# EAGLE board LabPower test2 (EAGLE 7.5.0)
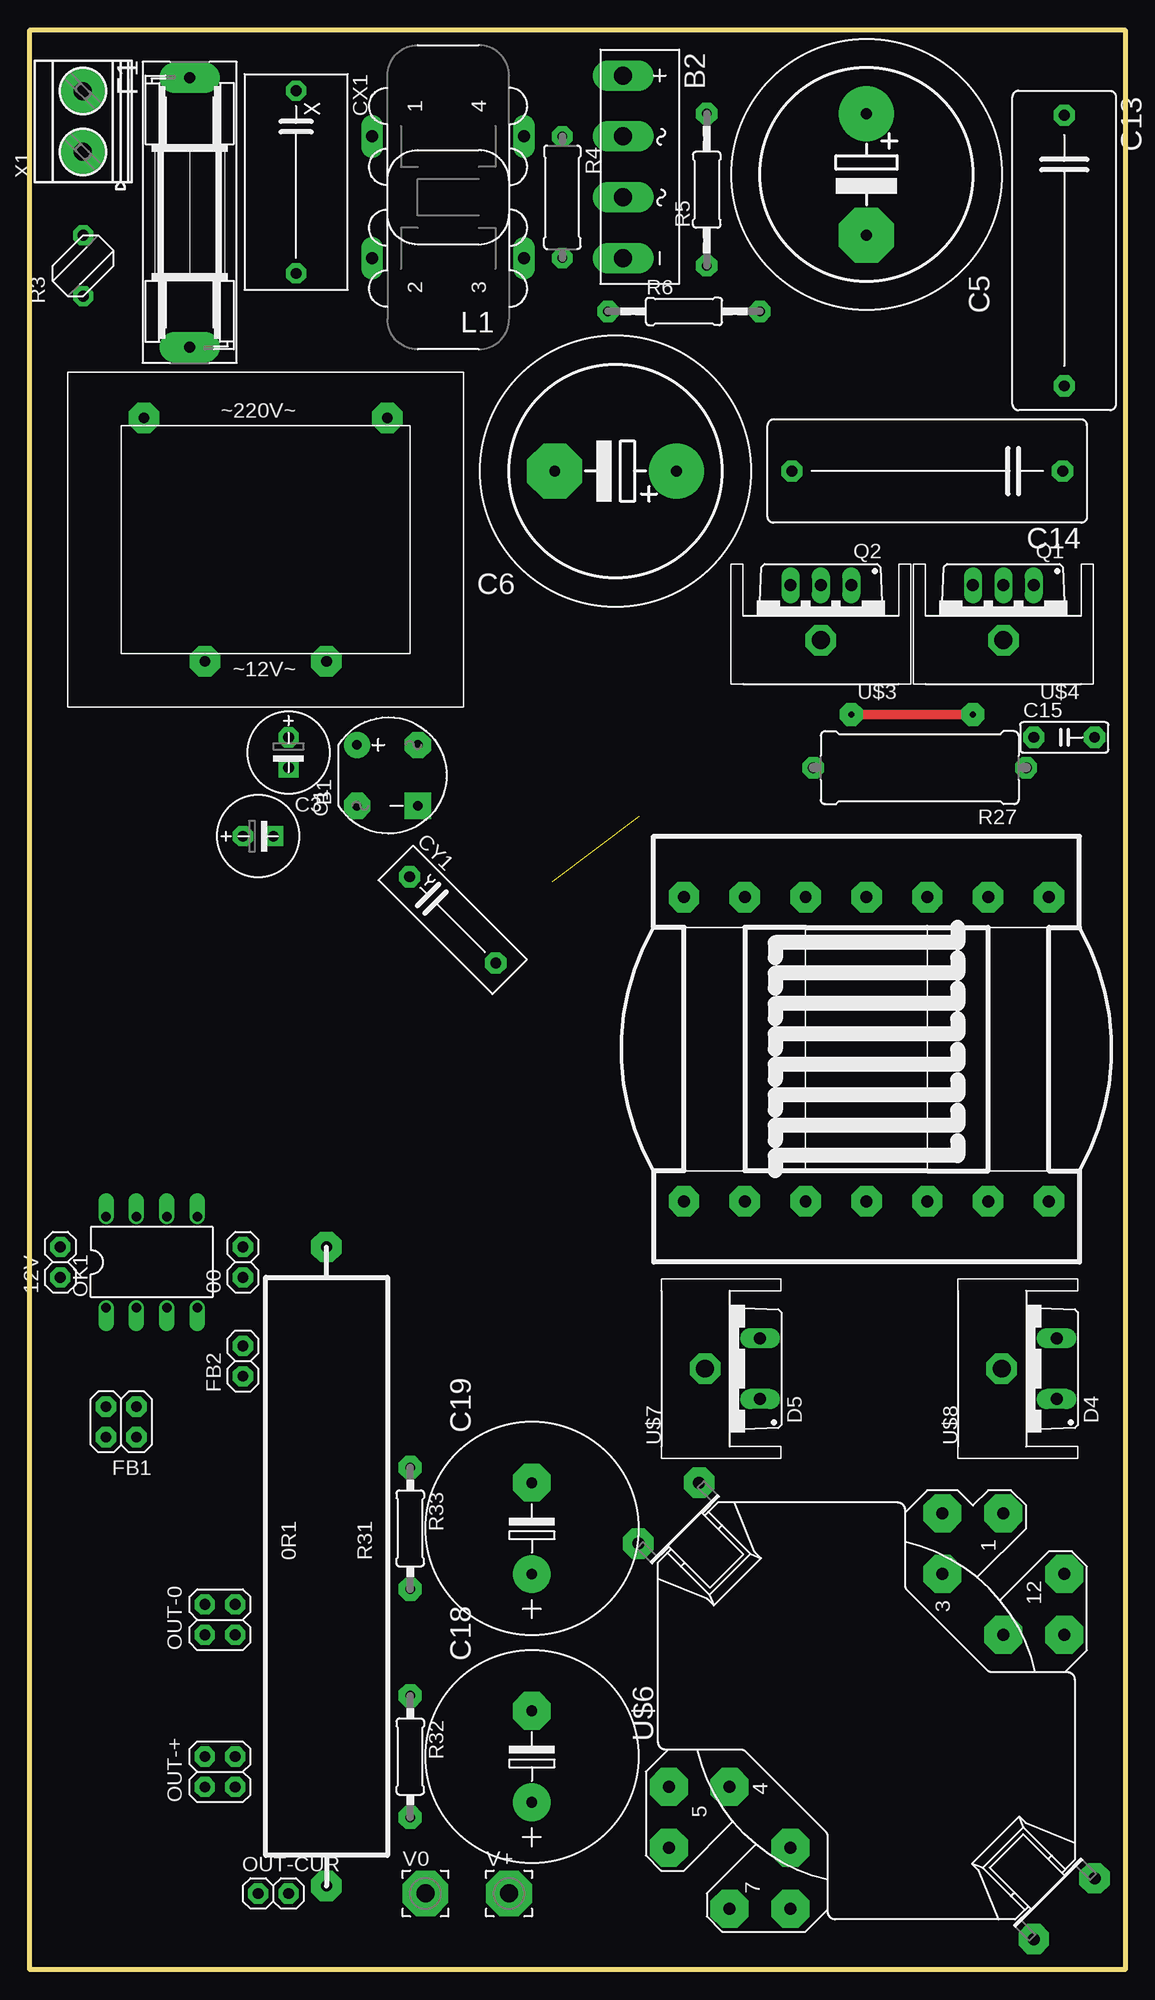
[diagram p0: board, top side]
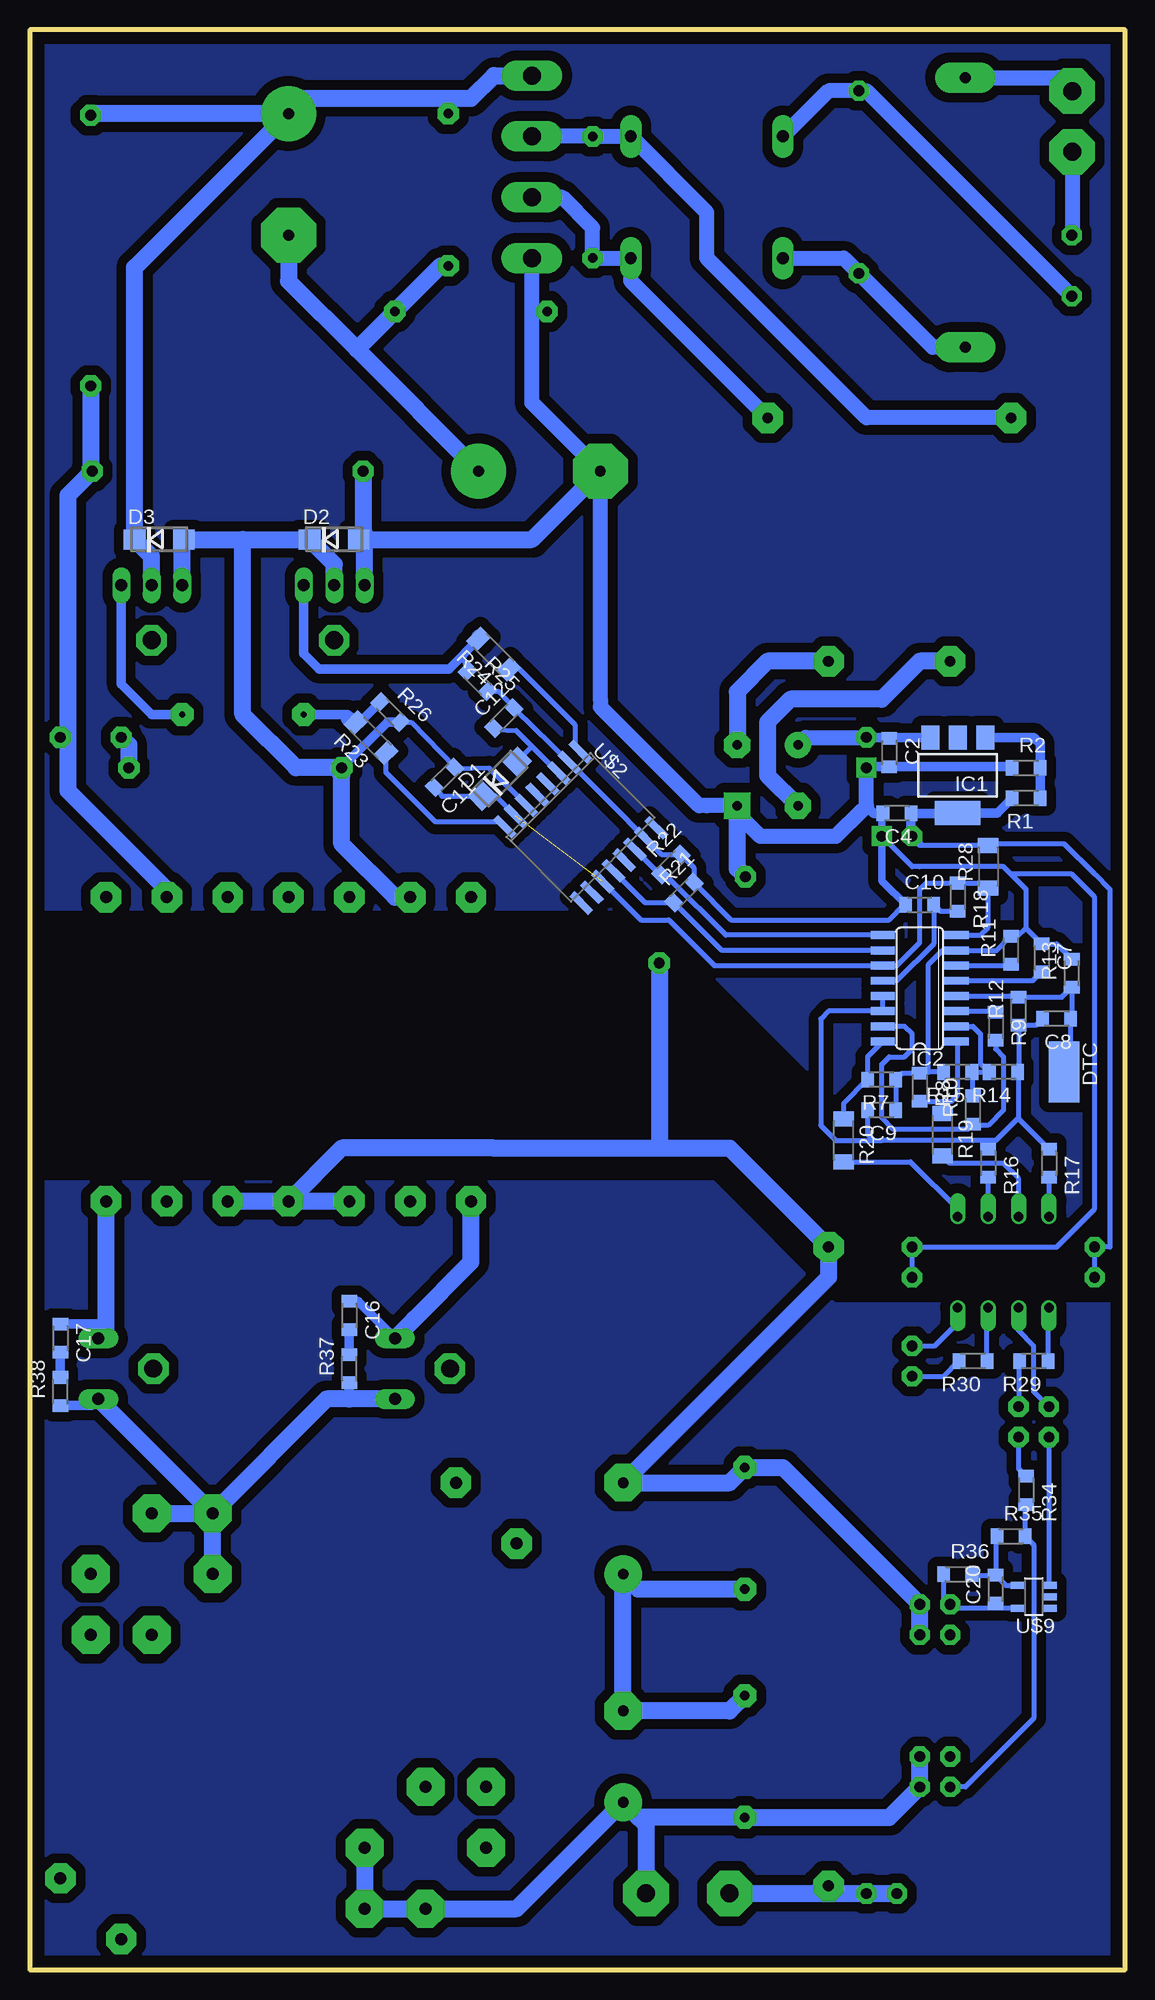
[diagram p1: board, bottom side, seen from below]

Size 91.44 x 161.92 mm. Coordinates in mm from the lower left corner, seen from the top.
Outline: 0,161.92 91.44,161.92 91.44,0 0,0 0,161.92
Copper layers (1*16): Top 0.035mm / dielectric 1.5mm / Bottom 0.035mm
Design rules "default *": minimum track width 10mil, minimum drill 24mil, track to track 8mil, track to pad 8mil, pad to pad 8mil, via to via 8mil, smd to smd 8mil, copper to edge 40mil, drill to drill 8mil, minimum pad ring 10mil, minimum via ring 8mil, stop-mask expansion 4mil, vias tented up to drill 0mil, thermal gap 10mil
Net classes: 0 default: clearance 0.205 mm

## Footprints (pad centres in the part's own frame; a part is rotated, then mirrored left to right if it is on the bottom)
1X02 = drill 0.9 pad 1.676 octagon: 1 -1.27,0; 2 1.27,0
RB1A = drill 0.8 pad 2.184: + -2.54,2.54 | drill 0.8 pad 2.184 square: - 2.54,-2.54 | drill 0.8 pad 2.184 octagon: AC1 2.54,2.54; AC2 -2.54,-2.54
KBL = drill 1.5 pad 2.54 long: + -7.62,-1.27; - 7.62,-1.27; AC1 2.54,-1.27; AC2 -2.54,-1.27
E2,5-7 = drill 0.9 pad 1.676 octagon: + -1.27,0 | drill 0.9 pad 1.676 square: - 1.27,0
C0805 = smd 1.05 x 1.3: 1 -1.175,0; 2 1.175,0
EB22,5D = drill 0.9 pad 4.597: + -5.08,0 | drill 0.9 pad 4.597 octagon: - 5.08,0
C225-087X268 = drill 0.9 pad 1.778 octagon: 1 -11.303,0; 2 11.303,0
C050-025X075 = drill 0.9 pad 1.778 octagon: 1 -2.54,0; 2 2.54,0
E7,5-18 = drill 0.9 pad 3.15: + -3.81,0 | drill 0.9 pad 3.15 octagon: - 3.81,0
XC15B8 = drill 0.9 pad 1.676 octagon: 1 -7.62,0; 2 7.62,0
YC10B4 = drill 0.9 pad 1.778 octagon: 1 -5.08,0; 2 5.08,0
DO214AC = smd 1.8 x 1.7: A 2.05,0; C -2.05,0
DO220S = drill 1 pad 1.676 long: A 2.54,-2.54; C -2.54,-2.54
SMD2,54-5,08 = smd 2.54 x 5.08: 1 0,0
SH22,5 = drill 0.9 pad 2.54 long: 1 -11.252,0; 2 11.252,0
2X02 = drill 0.9 pad 1.676 octagon: 1 -1.27,-1.27; 2 -1.27,1.27; 3 1.27,-1.27; 4 1.27,1.27
SOT223 = smd 1.5 x 2: 1 -2.3,-3.15; 2 0,-3.15; 3 2.3,-3.15 | smd 3.8 x 2: 4 0,3.15
SO16 = smd 0.66 x 2.032: 1 -4.445,-3.073; 2 -3.175,-3.073; 3 -1.905,-3.073; 4 -0.635,-3.073; 5 0.635,-3.073; 6 1.905,-3.073; 7 3.175,-3.073; 8 4.445,-3.073; 9 4.445,3.073; 10 3.175,3.073; 11 1.905,3.073; 12 0.635,3.073; 13 -0.635,3.073; 14 -1.905,3.073; 15 -3.175,3.073; 16 -4.445,3.073
82721K = drill 1 pad 1.778 long: 1 5.08,6.35; 2 -5.08,6.35; 3 -5.08,-6.35; 4 5.08,-6.35
DIL08 = drill 0.8 offset: 1 -3.81,-3.81; 2 -1.27,-3.81; 3 1.27,-3.81; 4 3.81,-3.81; 5 3.81,3.81; 6 1.27,3.81; 7 -1.27,3.81; 8 -3.81,3.81
TO220BV = drill 1 pad 1.422 long: D 0,-2.54; G -2.54,-2.54; S 2.54,-2.54
R0805 = smd 1.05 x 1.3: 1 -1.175,0; 2 1.175,0
B57164 = drill 0.9 pad 1.676 octagon: 1 -2.54,0; 2 2.54,0
0309/10 = drill 0.8 pad 1.676 octagon: 1 -5.08,0; 2 5.08,0
0207/12 = drill 0.8 pad 1.778 octagon: 1 -6.35,0; 2 6.35,0
R1206 = smd 1.25 x 1.7: 1 -1.775,0; 2 1.775,0
0617/17 = drill 0.9 pad 1.778 octagon: 1 -8.89,0; 2 8.89,0
SQP-10 = drill 0.9 pad 2.54 octagon: P$1 -26.67,0; P$2 26.67,0
0207/10 = drill 0.8 pad 1.93 octagon: 1 -5.08,0; 2 5.08,0
32.5-27.5-27.5 = drill 0.9 pad 2.54 octagon: 1 -10.16,-10.16; 5 10.16,-10.16; 7 5.08,10.16; 9 -5.08,10.16
SO16W = smd 0.6 x 2.2: 1 -4.445,-4.505; 2 -3.175,-4.505; 3 -1.905,-4.505; 4 -0.635,-4.505; 5 0.635,-4.505; 6 1.905,-4.505; 7 3.175,-4.505; 8 4.445,-4.505; 9 4.445,4.505; 10 3.175,4.505; 11 1.905,4.505; 12 0.635,4.505; 13 -0.635,4.505; 14 -1.905,4.505; 15 -3.175,4.505; 16 -4.445,4.505
SK95-3M3 = drill 1.5 pad 2.54 octagon: P$1 0,2.05
ETD29 = drill 1 pad 2.54 octagon: 1 -15.24,-12.7; 2 -10.16,-12.7; 3 -5.08,-12.7; 4 0,-12.7; 5 5.08,-12.7; 6 10.16,-12.7; 7 15.24,-12.7; 8 15.24,12.7; 9 10.16,12.7; 10 5.08,12.7; 11 0,12.7; 12 -5.08,12.7; 13 -10.16,12.7; 14 -15.24,12.7
RM14 = drill 1 pad 3.175 octagon: 1 16.51,-11.43; 2 16.51,-6.35; 3 11.43,-6.35; 4 -6.35,11.43; 5 -6.35,16.51; 6 -11.43,16.51; 7 -16.51,11.43; 8 -16.51,6.35; 9 -11.43,6.35; 10 6.35,-11.43; 11 6.35,-16.51; 12 11.43,-16.51 | drill 1 pad 2.54 octagon: M -19.05,-13.97; M1 -13.97,-19.05; M2 13.97,19.05; M3 19.05,13.97
SOT23-5 = smd 0.6 x 1.2: + 0,-2.576; A -0.95,0.036; C 0.95,-2.576; NC -0.95,-2.576; R 0.95,0.036
3,81/1,4 = drill 1.5 pad 3.81 octagon: 1 0,0
MKDSN1,5/2-5,08 = drill 1.5 pad 3.81 octagon: 1 -2.561,0.025; 2 2.519,0.025

## Placement (x,y rotation side)
00  [1X02]  17.78,59.05 90 top
12V  [1X02]  2.54,59.05 90 top
B1  [RB1A]  29.84,99.7 0 top
B2  [KBL]  50.8,150.49 270 top
C1  470u 25V  [E2,5-7]  21.59,101.6 270 top
C2  100n  [C0805]  19.68,101.6 270 bottom
C3  470u 25V  [E2,5-7]  19.05,94.62 0 top
C4  100n  [C0805]  19.05,96.52 180 bottom
C5  330u 200V  [EB22,5D]  69.85,149.86 270 top
C6  330u 200V  [EB22,5D]  48.89,125.09 180 top
C7  1n  [C0805]  6.99,84.45 270 bottom
C8  1u  [C0805]  5.71,79.38 180 bottom
C9  100n  [C0805]  20.32,71.76 180 bottom
C10  1u  [C0805]  17.14,88.9 0 bottom
C11  10u  [C0805]  56.81,99.53 225 bottom
C12  10u  [C0805]  51.87,104.47 45 bottom
C13  1u5 400V  [C225-087X268]  86.36,143.51 270 top
C14  1u5 400V  [C225-087X268]  74.93,125.09 180 top
C15  1n 1000V  [C050-025X075]  86.36,102.87 0 top
C16  3n3  [C0805]  64.77,54.61 270 bottom
C17  3n3  [C0805]  88.9,52.7 270 bottom
C18  2700u 25V  [E7,5-18]  41.91,17.78 90 top
C19  2700u 25V  [E7,5-18]  41.91,36.83 90 top
C20  100n  [C0805]  10.79,31.75 90 bottom
CX1  [XC15B8]  22.23,149.22 270 top
CY1  [YC10B4]  35.3,87.63 315 top
D1  ES1J  [DO214AC]  52.19,99.4 45 bottom
D2  ES1J  [DO214AC]  66.04,119.38 0 bottom
D3  ES1J  [DO214AC]  80.65,119.38 0 bottom
D4  STTH1502D  [DO220S]  83.19,50.16 90 top
D5  STTH1502D  [DO220S]  58.42,50.16 90 top
DRILEGEND  [DRILEGEND]  -6.92,-4.01 0 top  (outside the outline)
DTC  [SMD2,54-5,08]  5.08,74.93 180 bottom
F1  FUSESH22,5  [SH22,5]  13.34,146.69 270 top
FB1  [2X02]  7.62,45.72 180 top
FB2  [1X02]  17.78,50.8 90 top
IC1  LD117ASTR  [SOT223]  13.97,99.7 180 bottom
IC2  TL494CD  [SO16]  17.14,81.92 90 bottom
L1  FILTER_01  [82721K]  34.92,147.95 90 top
OK1  TLP521-2  [DIL08]  10.16,59.05 0 top
OUT-0  [2X02]  15.88,29.21 90 top
OUT-+  [2X02]  15.88,16.51 90 top
OUT-CUR  [1X02]  20.32,6.35 0 top
Q1  STP11NM60ND  [TO220BV]  81.28,113.03 180 top
Q2  STP11NM60ND  [TO220BV]  66.04,113.03 180 top
R1  360R  [R0805]  8.26,97.79 180 bottom
R2  3K  [R0805]  8.26,100.33 0 bottom
R3  [B57164]  4.45,142.24 90 top
R4  [0309/10]  44.45,147.95 270 top
R5  160K  [0207/12]  56.51,148.59 90 top
R6  160K  [0207/12]  54.61,138.43 0 top
R7  1K  [R0805]  20.32,74.3 180 bottom
R8  1K  [R0805]  17.14,73.66 270 bottom
R9  51K  [R0805]  10.79,78.74 270 bottom
R10  510R  [R0805]  12.7,71.76 90 bottom
R11  4K7  [R0805]  9.53,85.09 90 bottom
R12  51K  [R0805]  8.89,80.01 90 bottom
R13  910R  [R0805]  4.45,83.19 90 bottom
R14  5K1  [R0805]  10.16,74.93 180 bottom
R15  5K1  [R0805]  13.97,74.93 180 bottom
R16  51R  [R0805]  11.43,67.31 270 bottom
R17  51R  [R0805]  6.35,67.31 270 bottom
R18  51R  [R0805]  13.97,89.54 270 bottom
R19  0  [R1206]  15.24,69.69 270 bottom
R20  0  [R1206]  23.5,69.22 270 bottom
R21  10K  [R0805]  36.83,89.91 45 bottom
R22  10K  [R0805]  37.91,92.26 45 bottom
R23  27R  [R1206]  62.97,102.83 135 bottom
R24  27R  [R1206]  52.72,109.8 135 bottom
R25  1K  [R0805]  54.07,107.56 315 bottom
R26  1K  [R0805]  61.36,104.97 315 bottom
R27  100R  [0617/17]  74.3,100.33 180 top
R28  0  [R1206]  11.43,92.08 90 bottom
R29  1k  [R0805]  7.62,50.8 180 bottom
R30  1k  [R0805]  12.7,50.8 180 bottom
R31  0R1  [SQP-10]  24.77,33.65 270 top
R32  10K  [0207/10]  31.75,17.78 270 top
R33  10K  [0207/10]  31.75,36.83 270 top
R34  6k8  [R0805]  8.26,40 270 bottom
R35  15k  [R0805]  9.53,36.2 0 bottom
R36  1k  [R0805]  13.97,33.02 0 bottom
R37  10R  [R0805]  64.77,50.16 90 bottom
R38  10R  [R0805]  88.9,48.26 90 bottom
U$1  220V-12V-2.1VA  [32.5-27.5-27.5]  19.68,119.38 180 top
U$2  IR2113SPBF  [SO16W]  45.46,95.36 225 bottom
U$3  SK95-3M3  [SK95-3M3]  66.04,113.03 180 top
U$4  SK95-3M3  [SK95-3M3]  81.28,113.03 180 top
U$5  ETD29_P1_S1-MIDDLE  [ETD29]  69.85,76.84 180 top
U$6  DROSSEL-R14  [RM14]  69.85,21.59 90 top
U$7  SK95-3M3  [SK95-3M3]  58.42,50.16 90 top
U$8  SK95-3M3  [SK95-3M3]  83.19,50.16 90 top
U$9  TL431-IDBVR  [SOT23-5]  8.89,31.11 90 bottom
V0  [3,81/1,4]  33.02,6.35 0 top
V+  [3,81/1,4]  40,6.35 0 top
X1  MKDSN1,5/2-5,08  [MKDSN1,5/2-5,08]  4.45,154.3 90 top

## Library data of the parts
00 12V FB1 FB2 OUT-0 OUT-+ OUT-CUR = pinhead
B1 B2 = rectifier
C1-C20 CX1 CY1 R1 R2 R4-R30 R32-R38 = rcl
D1-D5 = diode
DRILEGEND = drilegend
DTC V0 V+ = wirepad
F1 = fuse; OC_FARNELL: unknown; OC_NEWARK: unknown
IC1 = v-reg
IC2 = linear
L1 U$1 U$5 U$6 = _Transformers
OK1 = optocoupler; OC_FARNELL: unknown; OC_NEWARK: unknown
Q1 Q2 = transistor-power
R3 = ptc-ntc; MPN: B57164K474K52; OC_FARNELL: 9753451; OC_NEWARK: 29M3118
R31 U$2 = Namenlos
U$3 U$4 U$7 U$8 = heatsink
U$9 = TL431
X1 = con-phoenix-508

## Nets
12V: 12V.1 12V.2 C3.+ C4.1 IC1.4 R1.2 R28.2
300V: B2.+ C5.+ C13.1 D3.C Q1.D R5.2
AC1: B2.AC2 L1.4 R4.1 U$1.5
AC2: B2.AC1 L1.3 R4.2 U$1.1
FB1_A: FB1.1 R29.2
FB1_K: FB1.3 OK1.2
FB2_A: FB2.1 R30.2
FB2_K: FB2.2 OK1.4
GND: 00.1 00.2 B1.- B2.- C1.- C2.2 C3.- C4.2 C6.- C7.1 C9.1 C10.1 C12.2 C14.2 CY1.1 D2.A IC2.7 Q2.S R2.1 R6.1 R7.1 R8.1 R11.2 R13.2 R15.2 R21.2 R22.2 R25.2 U$2.2 U$2.15
LOWS0: C19.- CY1.2 OUT-0.1 OUT-0.3 R31.P$1 R33.1 U$5.10 U$5.11 U$5.12
LOWS+: C17.1 D4.A U$5.14
LOWS-: C16.1 D5.A U$5.8
N$1: B1.AC2 U$1.7
N$2: B1.AC1 U$1.9
N$3: B1.+ C1.+ C2.1 IC1.3
N$4: R23.1 U$2.8
N$5: C5.- C6.+ R5.1 R6.2
N$6: F1.1 X1.2
N$7: R3.2 X1.1
N$8: C8.2 C9.2 IC2.13 IC2.14 R12.1 R14.1 R16.1 R17.1
N$9: CX1.1 L1.1 R3.1
N$10: CX1.2 F1.2 L1.2
N$11: IC2.16 R7.2 R20.1
N$12: IC2.1 R8.2 R19.1
N$13: IC2.15 R9.2 R10.1
N$14: IC2.6 R11.1
N$15: IC2.3 R9.1
N$16: C7.2 IC2.5
N$17: OK1.7 R19.2
N$18: C8.1 DTC.1 IC2.4 R12.2 R13.1
N$19: IC2.2 R10.2 R14.2 R15.1
N$20: OK1.6 R16.2
N$21: OK1.8 R17.2
N$22: C10.2 IC2.12 R18.2
N$23: OK1.5 R20.2
N$24: Q2.G R24.2 R25.1
N$25: IC2.10 R21.1 U$2.12
N$26: D4.C D5.C R37.1 R38.1 U$6.1 U$6.2 U$6.3
N$28: IC1.1 R1.1 R2.2
N$29: IC2.9 R22.1 U$2.14
N$30: R24.1 U$2.1
N$31: Q1.G R23.2 R26.1
N$32: C13.2 C14.1 C15.2 U$5.2
N$33: C15.1 R27.1
N$34: C18.+ OUT-+.1 OUT-+.3 R32.2 U$6.7 U$6.8 U$6.9 V+.1
N$35: OK1.1 R29.1
N$36: OK1.3 R30.1
N$37: OUT-CUR.1 OUT-CUR.2 R31.P$2 V0.1
N$38: C18.- C19.+ R32.1 R33.2
N$39: FB1.2 R34.1
N$40: OUT-+.2 R34.2 R35.2
N$41: FB1.4 U$9.C
N$42: C20.1 OUT-0.4 R36.1 U$9.A
N$43: C20.2 R35.1 R36.2 U$9.R
N$46: C16.2 R37.2
N$47: C17.2 R38.2
VB: C11.2 D1.C IC2.8 IC2.11 R18.1 R28.1 U$2.7 U$2.11
VCC: C12.1 D1.A U$2.3
VS: C11.1 D2.C D3.A Q1.S Q2.D R26.2 R27.2 U$2.6 U$5.6

## Tracks (layer width: path | path; a pad name or v marks a point on that pad's centre or on a via)
12V
  Bottom 0.406: C3.+ 17.02,93.85 R28.2 11.3,93.98 5.08,93.98 2.54,91.44 1.27,90.17 1.27,60.32 12V.2 12V.1
  Bottom 0.61: 17.14,93.98 C3.+
  Bottom 0.813: C3.+ 17.88,94.71 C4.1 15.9,96.52 IC1.4 10.68,96.55 R1.2
300V
  Bottom 1.27: 86.23,154.94 C13.1 | R5.2 56.51,155.57 57.15,156.21
  Bottom 1.422: C5.+ 68.58,156.21 57.15,156.21 54.61,156.21 52.7,158.11 B2.+ | C5.+ 86.23,154.94 | C5.+ 82.7,142.09 D3.C 81.28,117.97 Q1.D
AC1
  Bottom 1.27: R4.1 L1.4 34.92,146.69 34.92,142.88 21.59,129.54 U$1.5 | 43.81,153.03 R4.1 | R4.1 B2.AC2
AC2
  Bottom 1.27: U$1.1 41.27,140.97 L1.3 R4.2 44.45,145.41 46.99,147.95 B2.AC1
FB1_A
  Bottom 0.406: R29.2 8.89,50.7 FB1.1
FB1_K
  Bottom 0.406: FB1.3 7.62,48.26 7.62,52.07 8.89,53.34 OK1.2
FB2_A
  Bottom 0.406: FB2.1 15.14,49.53 R30.2
FB2_K
  Bottom 0.406: FB2.2 15.88,52.07 13.97,53.97 OK1.4
GND
  Bottom 0.305: 50.91,105.17 C12.2
  Bottom 0.406: R13.2 5.71,85.63 C7.1 7.62,86.27 8.26,86.9 8.26,87 | 16.41,74.93 16.41,83.92 15.24,85.09 IC2.7 10.7,85.09 R11.2 8.99,86.27 8.26,87 | R15.2 16.41,74.93 | R8.1 16.41,74.93 | 17.24,74.93 R8.1 | R8.1 18.61,74.84 R7.1 C9.1 | R25.2 52.34,106.73 50.91,105.17 U$2.2 42.97,97.36 U$2.15 38.7,93.09 R22.2 36,92.01 R21.2 32.89,87.63 19.68,87.63 18.41,88.9 C10.1 | C3.- 17.78,92.08 17.14,92.08 10.16,92.08 | 8.26,87 8.26,90.17 10.16,92.08 | 00.1 00.2 5.71,60.32 2.54,63.5 2.54,89.54 4.45,91.44 9.53,91.44 10.16,92.08
  Bottom 0.61: C10.1 20.23,90.81 20.32,90.9 C3.- 20.32,96.42 C4.2
  Bottom 0.813: C1.- 21.5,100.42 C2.2 10.16,100.42 9.53,100.42 R2.1 | C4.2 20.96,96.52 21.59,97.16
  Bottom 1.27: 49.53,138.43 49.53,130.81 C6.- 43.81,106.05 43.81,105.41 39.37,100.97 35.56,97.16 34.92,97.16 B1.- 32.38,96.52 30.48,94.62 24.13,94.62 21.91,96.84 21.59,97.16 C1.- | 49.53,138.43 B2.- | R6.1 49.53,138.43 | 63.63,119.74 63.63,120.02 63.5,119.89
  Bottom 1.422: C14.2 63.63,120.02 | 63.63,119.74 D2.A 49.53,119.38 C6.- | Q2.S 63.5,119.89 | CY1.1 32.38,91.9 32.38,96.52
LOWS0
  Bottom 1.422: U$5.10 U$5.11 | U$5.11 U$5.12 | U$5.11 65.41,68.58 52.7,68.58 38.73,68.58 | 38.73,68.58 33.02,68.58 R31.P$1 24.77,57.78 C19.- 33.02,40.64 R33.1 28.57,41.91 OUT-0.3 OUT-0.1 | CY1.2 38.89,68.73 38.73,68.58
LOWS+
  Bottom 0.813: C17.1 85.63,53.88 85.09,53.34
  Bottom 1.422: D4.A 85.09,53.34 U$5.14
LOWS-
  Bottom 0.813: C16.1 64.04,55.78 D5.A
  Bottom 1.422: D5.A 59.37,54.29 54.61,59.05 U$5.8
N$1
  Bottom 1.422: U$1.7 17.14,109.22 20.32,106.05 27.94,106.05 29.84,104.14 29.84,99.7 B1.AC2
N$2
  Bottom 1.422: U$1.9 29.84,109.22 32.38,106.68 B1.AC1
N$3
  Bottom 0.813: C1.+ 19.78,102.87 C2.1 19.62,102.84 IC1.3
  Bottom 1.27: B1.+ 26.67,102.87 C1.+
N$4
  Bottom 0.406: U$2.8 52.19,95.81 57.58,95.81 61.71,99.94 R23.1
N$5
  Bottom 1.27: R5.1 57.15,142.24
  Bottom 1.422: C5.- 69.85,140.97 64.14,135.25 | 64.14,135.25 C6.+ | 57.15,142.24 R6.2 64.14,135.25
N$6
  Bottom 1.27: F1.1 5.53,157.94 X1.2
N$7
  Bottom 1.27: X1.1 4.42,144.8 R3.2
N$8
  Bottom 0.406: IC2.13 IC2.14 24.77,80.01 25.4,79.38 25.4,70.48 24.13,69.22 20.96,69.22 | 8.89,71.12 10.79,69.22 11.43,69.22 | 8.89,71.12 8.89,75.03 | 20.96,69.22 20.32,69.22 12.7,69.22 11.43,69.22 | 8.89,75.03 R12.1 7.43,78.84 C8.2 | 8.89,75.03 R14.1 | C9.2 21.5,69.76 20.96,69.22 | R17.1 8.89,71.03 8.89,71.12 | R16.1 11.43,69.22
N$9
  Bottom 1.27: R3.1 21.59,156.84 CX1.1 24.77,156.84 L1.1
N$10
  Bottom 1.27: F1.2 16.05,135.43 CX1.2 23.5,142.88 L1.2
N$11
  Bottom 0.406: IC2.16 21.5,76.19 R7.2 23.5,72.3 R20.1
N$12
  Bottom 0.406: R8.2 15.24,72.48 | 15.24,72.48 14.51,72.48 13.97,73.03 13.97,77.37 IC2.1 | R19.1 15.24,72.48
N$13
  Bottom 0.406: R9.2 10.79,76.84 10.16,76.2 10.16,71.76 11.43,70.48 12.61,70.48 R10.1 13.11,70.17 19.37,70.17 20.32,71.12 20.32,75.56 19.68,76.2 18.41,76.2 17.78,76.84 17.78,78.11 18.41,78.74 IC2.15
N$14
  Bottom 0.406: IC2.6 9.62,83.82 R11.1
N$15
  Bottom 0.406: IC2.3 11.53,80.01 R9.1
N$16
  Bottom 0.406: IC2.5 7.71,82.55 C7.2
N$17
  Bottom 0.406: OK1.7 8.89,66.04 10.16,67.31 14.63,67.31 R19.2
N$18
  Bottom 0.406: IC2.4 9.62,81.28 R12.2 5.27,81.19 R13.1 4.45,80.11 C8.1 4.54,75.47 DTC.1
N$19
  Bottom 0.406: R14.2 11.53,74.93 | IC2.2 12.7,78.74 12.07,78.11 12.07,75.66 R14.2 | R14.2 R15.1 12.7,74.84 R10.2
N$20
  Bottom 0.406: OK1.6 R16.2
N$21
  Bottom 0.406: R17.2 OK1.8
N$22
  Bottom 0.406: IC2.12 19.05,82.55 15.97,85.63 C10.2 15.43,88.36 R18.2
N$23
  Bottom 0.406: R20.2 17.91,67.44 13.97,63.5 OK1.5
N$24
  Bottom 0.406: R25.1 55.3,109.74 R24.2
  Bottom 0.813: Q2.G 68.58,109.86 67.31,108.59 56.45,108.59 R24.2
  Bottom 1.27: 53.97,111.24 R24.2
N$25
  Bottom 0.406: U$2.12 40.07,89.08 R21.1 33.67,85.09 IC2.10
N$26
  Bottom 0.813: R37.1 64.77,47.62 | R38.1 86.27,47.08 D4.C
  Bottom 1.422: D4.C U$6.2 | D5.C 64.77,47.62 66.67,47.62 U$6.2 | U$6.3 U$6.2 | U$6.1 U$6.2
N$28
  Bottom 0.813: R1.1 R2.2 7.08,102.33 7.62,102.87 11.64,102.87 IC1.1
N$29
  Bottom 0.406: U$2.14 38.83,91.43 R22.1 38.41,91.43 37.94,90.96 | 37.78,90.81 37.94,90.96 | IC2.9 33.34,86.36 37.94,90.96
N$30
  Bottom 0.406: U$2.1 45.91,102.09 45.91,103.89 50.56,108.55 R24.1
N$31  (via drill 0.5 pad 1.93)
  Top 0.813: v68.58,104.78 v78.74,104.78
  Bottom 0.406: 64.41,104.25 R23.2
  Bottom 0.813: 64.41,104.25 64.94,104.78 v68.58,104.78 | v78.74,104.78 81.28,104.78 83.82,107.31 Q1.G | R23.2 63.91,104.09 R26.1
  Bottom 1.27: 64.86,104.43 R23.2
N$32
  Bottom 1.27: 86.36,125.22 C14.1
  Bottom 1.422: C13.2 86.36,125.22 | C14.1 88.27,123.06 88.27,102.87 | 88.27,102.87 88.27,98.42 80.01,90.17 U$5.2 | C15.2 88.27,102.87
N$33
  Bottom 1.422: C15.1 83.19,102.23 R27.1
N$34
  Bottom 1.422: U$6.9 U$6.8 U$6.7 50.8,5.08 C18.+ | OUT-+.3 OUT-+.1 19.68,12.7 R32.2 40.64,12.7 C18.+ | C18.+ 40,12.07 V+.1
N$35
  Bottom 0.406: OK1.1 6.45,55.15 R29.1
N$36
  Bottom 0.406: R30.1 11.53,55.15 OK1.3
N$37
  Bottom 1.422: V0.1 26.04,6.35 | 26.04,6.35 R31.P$2 | 26.04,6.35 OUT-CUR.2 OUT-CUR.1
N$38
  Bottom 1.422: R33.2 40.64,31.75 C19.+ C18.- 33.02,21.59 R32.1
N$39
  Bottom 0.406: R34.1 8.89,41.81 FB1.2
N$40
  Bottom 0.406: R34.2 8.35,38.73 R35.2 7.62,35.46 7.62,29.21 7.62,20.96 13.34,15.24 OUT-+.2
N$41
  Bottom 0.406: U$9.C 6.31,44.41 FB1.4
N$42
  Bottom 0.406: U$9.A 10.79,30.16 | 10.79,30.16 14.29,30.16 OUT-0.4 15.14,31.02 R36.1 | C20.1 10.79,30.16
N$43
  Bottom 0.406: R36.2 12.7,32.92 C20.2 | C20.2 9.94,32.06 U$9.R | R35.1 10.79,36.1 C20.2
N$44
  pour Bottom (isolate 0.813): 0,0 91.44,0 91.44,161.92 0,161.92
N$45
  cutout Bottom (isolate 0.813): 0,62.23 13.97,62.23 38.73,87 41.27,87 42.54,88.27 91.44,88.27 91.44,66.04 34.29,66.04 24.13,55.88 0,55.88
N$46
  Bottom 0.813: R37.2 C16.2
N$47
  Bottom 0.813: C17.2 R38.2
VB  (1 unrouted)
  Bottom 0.305: C11.2 57.51,98.57 | 57.51,98.57
  Bottom 0.406: U$2.7 52.54,97.95 D1.C 57.03,97.95 57.51,98.57 | IC2.8 12.07,86.36 11.43,87 R28.1 11.84,90.71 R18.1 16.61,90.71 17.14,90.17 17.14,85.73 19.05,83.82 IC2.11 34.29,83.82 38.1,87.63 40.42,87.63 U$2.11
VCC
  Bottom 0.305: C12.1 52.57,103.51 | 52.57,103.51
  Bottom 0.406: U$2.3 49.5,102.09 | 52.57,103.51 50.84,103.44 49.5,102.09 | D1.A 49.5,102.09
VS
  Bottom 0.305: C11.1 55.92,100.3 55.91,100.3
  Bottom 0.406: U$2.6 53.09,100.3 55.85,100.23 | 55.92,100.3 55.85,100.23 | R26.2 59.63,104.14 55.91,100.3 55.85,100.23
  Bottom 0.813: R27.2 61.59,104.14 R26.2
  Bottom 1.27: 78.74,119.23 D3.A | R27.2 66.04,100.33 65.41,99.7 | 67.7,118.99 D2.C 67.7,118.99
  Bottom 1.422: Q2.D 66.04,117.33 67.7,118.99 | D3.A 73.66,119.38 | 73.66,119.38 D2.C | Q1.S 78.74,119.23 | 66.04,100.33 69.22,100.33 73.66,104.78 73.66,119.38 | 65.41,99.7 65.41,93.98 60.96,89.54 U$5.6

## Text on the board
DrillLegend: LAYER-STACK
DrillLegend_01-16: 01-16